# EAGLE board LV_cutoff (EAGLE 7.7.0)
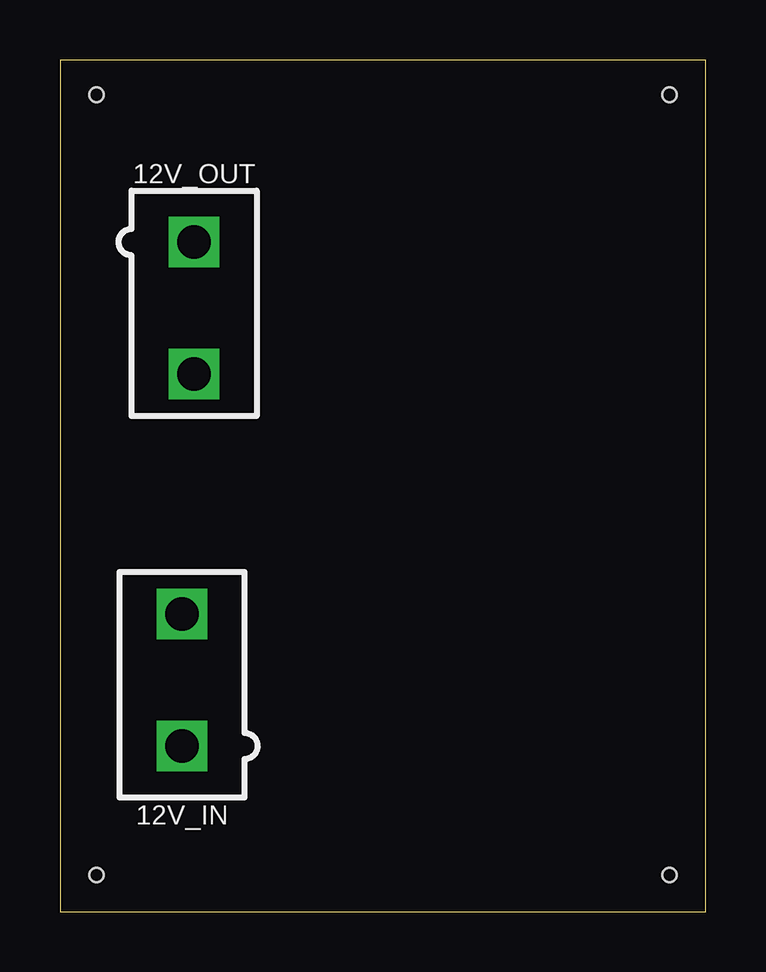
[diagram p0: board, top side]
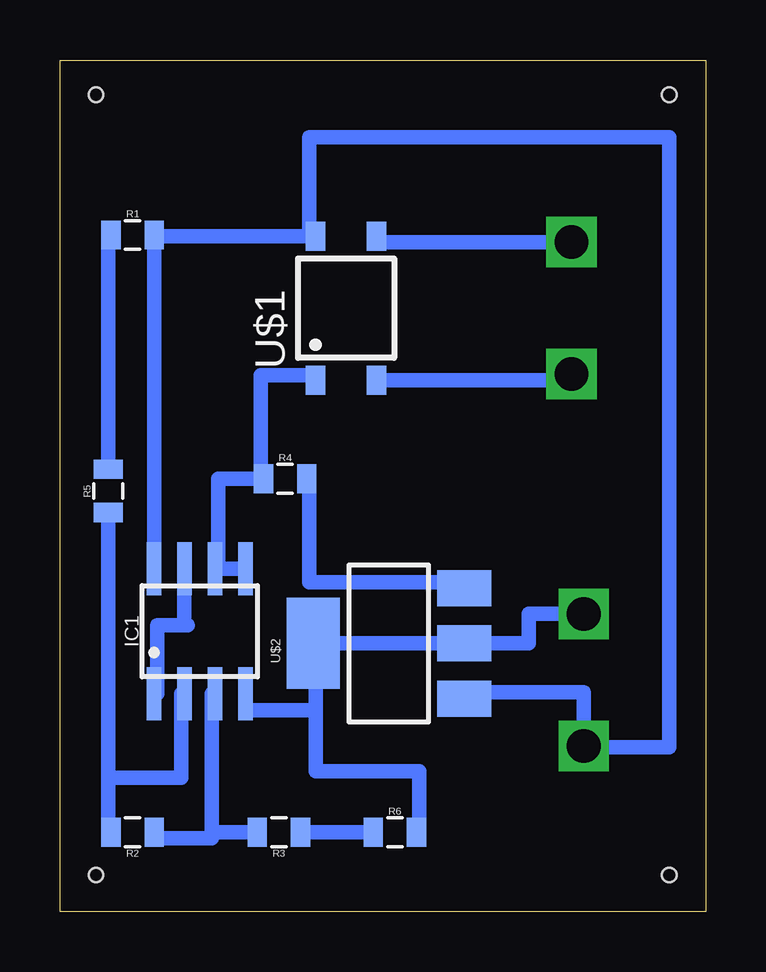
[diagram p1: board, bottom side, seen from below]

Size 26.9 x 35.48 mm. Coordinates in mm from the lower left corner, seen from the top.
Outline: 0,0 26.9,0 26.9,35.48 0,35.48 0,0
Copper layers (1*16): Top 0.035mm / dielectric 1.5mm / Bottom 0.035mm
Design rules "default": minimum track width 10mil, minimum drill 24mil, track to track 8mil, track to pad 8mil, pad to pad 8mil, via to via 8mil, smd to smd 8mil, copper to edge 40mil, drill to drill 8mil, minimum pad ring 10mil, minimum via ring 8mil, stop-mask expansion 4mil, vias tented up to drill 0mil, thermal gap 10mil
Holes 0.6 mm at 25.4,34.04 1.52,1.52 1.52,34.04 25.4,1.52

## Footprints (pad centres in the part's own frame; a part is rotated, then mirrored left to right if it is on the bottom)
MINIFIT_5566-2 = drill 1.4 square: 1 0,-2.75; 2 0,2.75
SOIC-08 = smd 0.6 x 2.2: 1 -1.905,-2.6; 2 -0.635,-2.6; 3 0.635,-2.6; 4 1.905,-2.6; 5 1.905,2.6; 6 0.635,2.6; 7 -0.635,2.6; 8 -1.905,2.6
0805 = smd 0.8 x 1.2: 1 -0.9,0; 2 0.9,0
SOP04 = smd 0.8 x 1.2: 1 -1.27,-3; 2 1.27,-3; 3 1.27,3; 4 -1.27,3
SOT223 = smd 1.5 x 2.235: 1 -2.3,-3.15; 2 0,-3.15; 3 2.3,-3.15 | smd 3.8 x 2.2: 4 0,3.15

## Placement (x,y rotation side)
12V_IN  MINIFIT_5566-2  [MINIFIT_5566-2]  5.08,9.65 0 top
12V_OUT  MINIFIT_5566-2  [MINIFIT_5566-2]  5.59,25.15 180 top
IC1  [SOIC-08]  21.08,11.68 0 bottom
R1  6800  [0805]  23.88,28.19 0 bottom
R2  430  [0805]  23.88,3.3 180 bottom
R3  680  [0805]  17.78,3.3 180 bottom
R4  [0805]  17.53,18.03 0 bottom
R5  510  [0805]  24.89,17.53 90 bottom
R6  100  [0805]  12.95,3.3 0 bottom
U$1  CPC1002N  [SOP04]  14.99,25.15 0 bottom
U$2  [SOT223]  13.21,11.18 90 bottom

## Library data of the parts
12V_IN 12V_OUT = HyTechDevices; OC_FARNELL: 1822072; OC_NEWARK: unknown
IC1 R1-R6 U$1 U$2 = HyTechDevices

## Nets
12V: 12V_IN.1 IC1.8 R1.2 U$1.4 U$2.1
12V_OUT: 12V_OUT.1 U$1.3
GND: 12V_IN.2 IC1.4 R6.2 U$2.2 U$2.4
N$1: IC1.5 IC1.6 R4.1 U$1.1
N$2: IC1.1 IC1.7
N$3: R4.2 U$2.3
N$4: IC1.2 R2.2 R5.1
N$5: IC1.3 R2.1 R3.2
N$7: 12V_OUT.2 U$1.2
N$8: R3.1 R6.1
N$9: R1.1 R5.2

## Tracks (layer width: path | path; a pad name or v marks a point on that pad's centre or on a via)
12V
  Bottom 0.61: U$2.1 10.06,9.14 5.08,9.14 12V_IN.1 5.08,6.86 1.52,6.86 1.52,32.26 16.51,32.26 16.51,28.15 U$1.4 22.98,28.15 R1.2 IC1.8
12V_OUT
  Bottom 0.61: 12V_OUT.1 13.72,27.9 U$1.3
GND
  Bottom 0.61: 16.26,8.38 16.26,11.18 U$2.4 U$2.2 7.37,11.18 7.37,12.4 12V_IN.2 | 16.26,8.38 19.18,8.38 IC1.4 | R6.2 11.94,3.3 11.94,5.84 16.26,5.84 16.26,8.38
N$1
  Bottom 0.61: IC1.5 IC1.6 20.32,14.28 20.32,18.03 R4.1 18.54,18.03 18.54,22.35 16.26,22.35 U$1.1
N$2
  Bottom 0.61: IC1.1 22.86,9.08 22.86,11.94 21.72,11.94 | 21.59,11.94 21.72,11.94 | 21.72,11.94 IC1.7
N$3
  Bottom 0.61: R4.2 16.51,18.03 16.51,13.72 10.06,13.72 U$2.3
N$4
  Bottom 0.61: R2.2 24.89,3.3 24.89,5.59 | 24.89,5.59 R5.1 | IC1.2 21.84,9.08 21.84,5.59 24.89,5.59
N$5
  Bottom 0.61: IC1.3 20.57,9.08 20.57,3.3 | 20.57,3.3 20.57,3.05 22.98,3.05 R2.1 | R3.2 20.57,3.3
N$7
  Bottom 0.61: U$1.2 5.59,22.15 12V_OUT.2
N$8
  Bottom 0.61: R6.1 R3.1
N$9
  Bottom 0.61: R1.1 24.89,28.19 R5.2